# Altium PCB PCB.pcbdoc
Units mm, origin at the board's own origin, x right, y up, seen from the top; angles counter-clockwise.
Board outline 65 x 59.9 mm, 2 copper layers (Top Layer, Bottom Layer); 28 components, 17 nets, 68 pads, 29 vias.
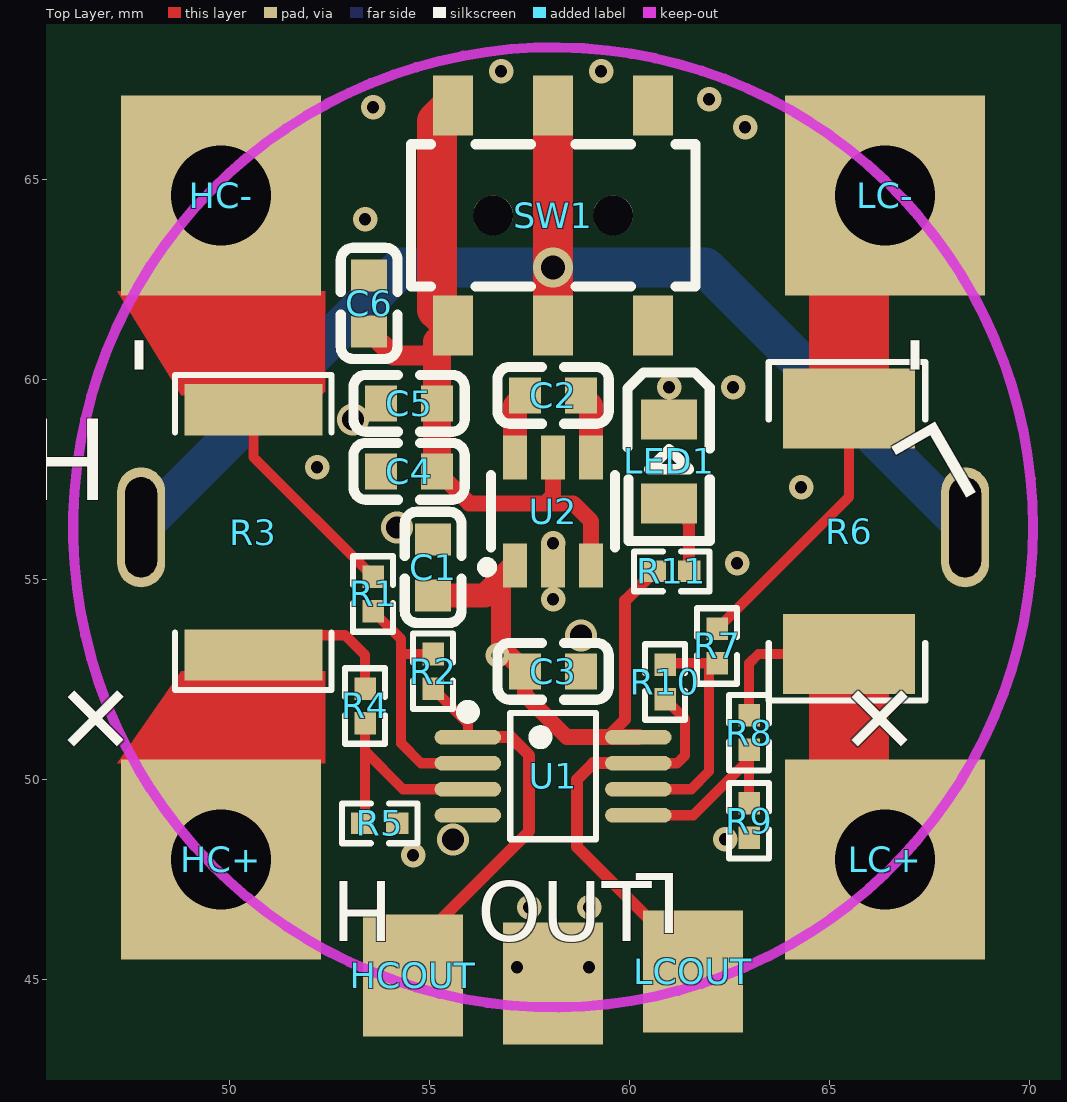
[diagram p0: Top Layer view]
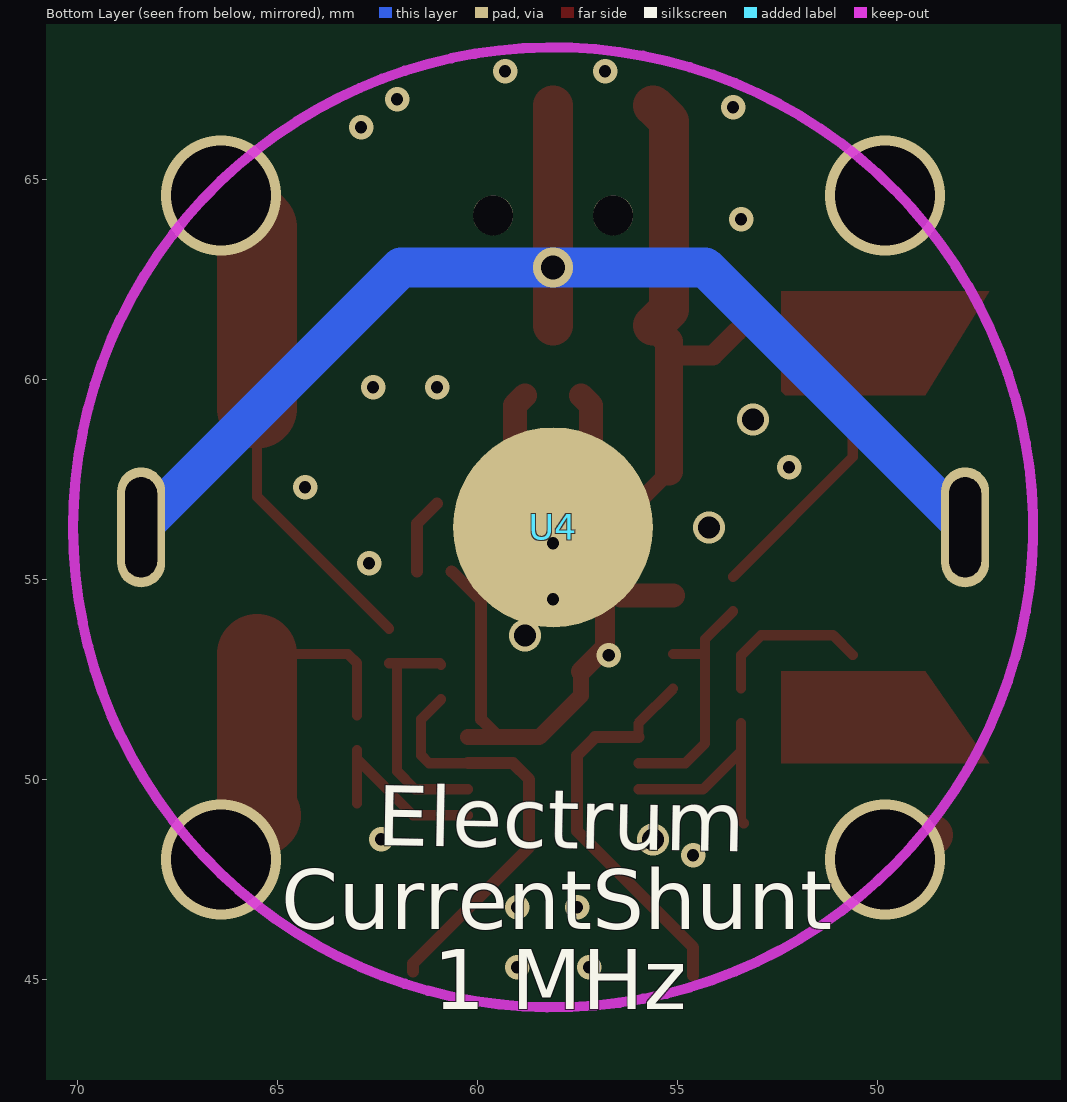
[diagram p1: Bottom Layer view, seen from below]

## Layer stack, top to bottom
Top Layer: signal copper (thickness not stored)
Dielectric: dielectric 0.32, FR-4, Dk 4.8
Bottom Layer: signal copper (thickness not stored)

## Board outline
90.4,25.4 25.4,25.4 25.4,85.3 90.4,85.3

## Components (designator, comment, footprint, x,y, rotation, side; value= is the part's Value field where it differs from the comment)
C1 "22uF" C0603 55.1,55.3 r90 top
C2 "2.2uF" C0603 58.1,59.6 r180 top
C3 "22uF" C0603 58.1,52.7 r0 top
C4 "22uF" C0603 54.5,57.7 r0 top
C5 "22uF" C0603 54.5,59.4 r0 top
C6 "22uF" C0603 53.5,61.9 r270 top
HC+ "Pad" PAD#1 32.09,36.408 r0 top
HC- "Pad" PAD#2 33.59,51.708 r0 top
HCOUT "Pad" PAD#3 38.09,32.908 r0 top
LC+ "Pad" PAD#4 51.09,36.508 r0 top
LC- "Pad" PAD#5 50.09,52.408 r0 top
LCOUT "Pad" PAD#3 45.09,33.008 r0 top
LED1 "0805G (Green)" LED0805-R-RD 61,57.95 r270 top
R1 "1kΩ" R0402 53.6,54.633 r270 top
R2 "20kΩ" R0402 55.1,52.7 r270 top
R3 "50mΩ" R2512 50.607,56.173 r90 top
R4 "1kΩ" R0402 53.4,51.833 r270 top
R5 "20kΩ" R0402 53.767,48.9 r180 top
R6 "500mΩ" RES-SMD_L6.4-W3.2-R2512 65.5,56.2 r90 top
R7 "1kΩ" R0402 62.2,53.333 r90 top
R8 "1kΩ" R0402 63,51.167 r90 top
R9 "20kΩ" R0402 63,48.967 r270 top
R10 "20kΩ" R0402 60.9,52.433 r90 top
R11 "10kΩ" R0402 61.067,55.2 r180 top
SW1 "MS-22C01-G010" SW-SMD_6P-L7.2-W3.5-P2.50-LS6.0-TL 58.1,64.1 r0 top
U1 "OPA2322AIDGKR" VSSOP-8_L3.0-W3.0-P0.65-LS5.0-BL 58.1,50.077 r270 top
U2 "HX4002" SOT-23-6_L2.9-W1.6-P0.95-LS2.8-BR 58.1,56.7 r270 top
U4 "MY-2032-02 COPY" BATT-TH_MY-2032-02 58.1,56.3 r0 bottom

## Footprints (in the part's own frame and the unit in brackets; to place one, negate y for a bottom-side part, rotate by r counter-clockwise, add the part's x,y. Pads: shape width x height; smd on the part's side, far side on the other; paste and mask are expansions set on the pad)
BATT-TH_MY-2032-02 [mm]
  oval 1.2x3 hole 0.8 slot 2.5 at 90 deg paste+0 mask+0.051: 1(-10.3,0) 1(10.3,0)
  round 5 smd paste+0 mask+0.051: 2(0,0)
C0603 [mm]
  rect 0.8x0.9 smd paste+0 mask+0.051: 1(-0.7,0) 2(0.7,0)
  silkscreen extent -1.39,-0.71 1.39,0.71
LED0805-R-RD [mm]
  rect 1x1.4 smd paste+0 mask+0.051: 1(1.05,0) 2(-1.05,0)
  silkscreen extent -2.22,-1.04 1.99,1.01
PAD#1 [mm]
  rect 5x5 smd paste+0 mask+0.051: 1(17.71,11.592)
PAD#2 [mm]
  rect 5x5 smd paste+0 mask+0.051: 1(16.21,12.892)
PAD#3 [mm]
  rect 2.5x3.048 smd paste+0 mask+0.051: 1(16.51,12.192)
PAD#4 [mm]
  rect 5x5 smd paste+0 mask+0.051: 1(15.31,11.492)
PAD#5 [mm]
  rect 5x5 smd paste+0 mask+0.051: 1(16.31,12.192)
R0402 [mm]
  rect 0.566x0.54 smd paste-100 mask+0.051: 1(-0.433,0) 2(0.433,0)
  silkscreen extent -0.94,-0.5 0.94,0.5
R2512 [mm]
  rect 1.283x3.456 smd paste-100 mask+0.051: 1(-3.066,0) 2(3.066,0)
  silkscreen extent -3.94,-1.96 3.94,1.96
RES-SMD_L6.4-W3.2-R2512 [mm]
  rect 2x3.3 smd paste+0 mask+0.051: 1(-3.066,0) 2(3.066,0)
  silkscreen extent -4.23,-1.91 4.23,2.01
SOT-23-6_L2.9-W1.6-P0.95-LS2.8-BR [mm]
  rect 1.1x0.6 smd paste+0 mask+0.051: 1(1.35,-0.95) 2(1.35,0) 3(1.35,0.95) 4(-1.35,0.95) 5(-1.35,0) 6(-1.35,-0.95)
  silkscreen extent -0.9,-1.78 1.52,1.55
SW-SMD_6P-L7.2-W3.5-P2.50-LS6.0-TL [mm]
  rect 1x1.5 smd paste+0 mask+0.05: 1(-2.5,2.75) 2(0,2.75) 3(2.5,2.75) 4(-2.5,-2.75) 5(0,-2.75) 6(2.5,-2.75)
  round 1 hole 1 unplated paste+0: ""(-1.5,0) ""(1.5,0)
  silkscreen extent -3.56,-1.78 3.56,1.78
VSSOP-8_L3.0-W3.0-P0.65-LS5.0-BL [mm]
  oval 0.364x1.662 smd paste+0 mask+0.051: 1(-0.975,-2.131) 2(-0.325,-2.131) 3(0.325,-2.131) 4(0.975,-2.131) 5(0.975,2.131) 6(0.325,2.131) 7(-0.325,2.131) 8(-0.975,2.131)
  silkscreen extent -1.76,-2.28 1.58,1.07

## Free pads (board coordinates)
  rect 2.5x3.048 smd paste+0 mask+0.051: 1(58.1,44.9)

## Via types
v1: diameter 0.61, hole 0.305, Top Layer to Bottom Layer, tented both sides, 20 vias
v2: diameter 0.8, hole 0.55, Top Layer to Bottom Layer, tented both sides, 4 vias
v3: diameter 3, hole 2.5, Top Layer to Bottom Layer, tented both sides, 4 vias
v4: diameter 1, hole 0.6, Top Layer to Bottom Layer, tented both sides, 1 vias

## Nets (pads, with @x,y where several pads share a name; then routed paths per layer and width w, separated by ;. In a path a pad name is that pad's centre, name@x,y a point inside that pad or via, vN(x,y) a via of type N, cw(c..) or ccw(c..) an arc to the next point about the centre after c; other vN are vias at no path point)
5V: C1.1 C3.1 R11.2 U1.8 U2.1 | length 14.2
  Top Layer w0.3: 59.17,51.052 59.452,51.052 59.9,51.5 59.9,54.466 R11.2
  Top Layer w0.4: C3.1 57.4,52.1 58.448,51.052 U1.8
  Top Layer w0.5: U2.1 56.799,54.999 56.799,53.3 C3.1
  Top Layer w0.6: C1.1 56.4,54.6 U2.1
  other v1: 56.71,53.1
B+: C4.2 C5.2 C6.2 SW1.1 SW1.4 U2.3 U2.5 | length 18.3
  Top Layer w0.4: C4.2 56,56.9 57.9,56.9 ; U2.5 58.1,57.1 57.9,56.9 ; U2.3 59.05,56.45 58.6,56.9 57.9,56.9
  Top Layer w0.5: C6.2@53.5,61.2 54.101,60.599 55.2,60.599
  Top Layer w0.7: C4.2 C5.2 55.2,60.95 SW1.4
  Top Layer w1: SW1.4@55.601,61.349 55.199,61.751 55.199,66.45 SW1.1
GND: C1.2 C3.2 C4.1 C5.1 C6.1 LED1.2 pad.1 R5.1 R9.2 U1.4 U2.2 U4.2
  other v1: 57.2,45.3 59,45.3 57.5,46.8 59,46.8 54.6,48.1 62.4,48.5 58.1,54.5 62.7,55.4 58.1,55.9 64.3,57.3 52.2,57.8 61,59.8 62.6,59.8 53.4,64 62.9,66.3 53.6,66.8 62,67 56.8,67.7 59.3,67.7
  other v2: 55.6,48.5 58.8,53.6 54.2,56.3 53.1,59
LED1_1: LED1.1 R11.1 | length 1.9
  Top Layer w0.3: LED1.1 61.5,56.4 R11.1
R1_1: HC-.1 R1.1 R3.2 | length 5.4
  Top Layer w0.254: R3.2 50.607,58.059 R1.1
  other v3: 49.8,64.6
R3_1: HC+.1 R3.1 R4.1 | length 6
  Top Layer w0.254: R3.1 51.1,53.6 52.9,53.6 53.4,53.1 R4.1
  Top Layer w1: HC+.1@48.6,48.601 HC+.1@50.607,48.601
  other v3: 49.8,48
R6_1: LC+.1 R6.1 R8.2 | length 8
  Top Layer w0.254: R8.2 63,52.9 63.234,53.134 R6.1
  Top Layer w2: LC+.1@65.4,49.1 65.5,49.2 R6.1
  other v3: 66.4,48
R6_2: LC-.1 R6.2 R7.2 | length 12.6
  Top Layer w0.254: R7.2 65.5,57.066 R6.2
  Top Layer w2: R6.2 65.5,63.8 66.1,64.4 66.3,64.6 v3(66.4,64.6)
SW1_5: SW1.2 SW1.5 U4.1 | length 31.5
  Top Layer w1: SW1.5 v4(58.1,62.8) SW1.2
  Bottom Layer w1: U4.1@47.8,56.3 54.3,62.8 v4(58.1,62.8) 61.9,62.8 U4.1@68.4,56.3
U1_1: HCOUT.1 R2.2 U1.1 | length 10
  Top Layer w0.254: R2.2 55.969,51.398 U1.1
  Top Layer w0.3: HCOUT.1 54.6,45.8 57.501,48.703 57.501,50.6 57.048,51.052 U1.1
U1_2: R1.2 R2.1 U1.2 | length 6.3
  Top Layer w0.254: R1.2@53.599,54.199 54.3,53.501 54.3,50.9 54.798,50.402 U1.2 ; 54.3,53.064 54.369,53.133 R2.1
U1_3: R4.2 R5.2 U1.3 | length 6.2
  Top Layer w0.254: R5.2 53.4,48.966 R4.2 53.4,50.7 54.348,49.752 U1.3
U1_5: R8.1 R9.1 U1.5 | length 4.9
  Top Layer w0.254: U1.5 61.602,49.102 63,50.5 R8.1 R9.1
U1_6: R7.1 R10.2 U1.6 | length 6.2
  Top Layer w0.254: U1.6 61.552,49.752 61.999,50.199 61.999,52.899 R7.1@62.2,52.899 ; R10.2 60.934,52.9 R7.1
U1_7: LCOUT.1 R10.1 U1.7 | length 10.6
  Top Layer w0.254: U1.7 61.202,50.402 61.4,50.6 61.4,51.5 R10.1
  Top Layer w0.3: U1.7 59.103,50.402 58.699,50.001 58.699,48.302 61.6,45.401 LCOUT.1
U2_4: C2.1 U2.4 | length 1.7
  Top Layer w0.6: C2.1 59.05,59.35 U2.4
U2_6: C2.2 U2.6 | length 1.7
  Top Layer w0.6: U2.6 57.15,59.35 C2.2
pads on no net: SW1. SW1.3 SW1.6

## Polygon pours and split planes (outlines as drawn)
GND on Bottom Layer (solid): 39.8,71 40.6,70.2 77.7,70.2 76.3,68.8 76.3,38.1 75.3,39.1 38.5,39.1
GND on Top Layer (solid): 39.4,72.6 40.2,71.8 77.3,71.8 75.9,70.4 75.9,39.7 74.9,40.7 38.1,40.7

## Keep-outs
Keep-Out Layer:
  circle w0.254: c58.1,56.3 r12

## Other copper
Top Layer:
  region net R3_1: 52.4,52.7 52.4,50.4 47.2,50.4 48.8,52.7
  region net R1_1: 52.4,62.2 52.4,59.7 52.3,59.6 48.8,59.6 47.2,62.2

## Silkscreen, mask and mechanical layers (free items; w line width, h text height)
Top Overlay:
  text "-" at 48.516,60.1 h2.03 r90
  text "-" at 67.916,60.1 h2.03 r90
  text "L" at 67.892,59.08 h2.03 r210
  text "H" at 47,59.016 h2.03 r180
  text "+" at 48.118,51.318 h2.03 r135
  text "+" at 67.718,51.318 h2.03 r135
  text "L" at 61.3,47.65 h1.5 r180
  text "H" at 54.1,47.45 h1.5 r180
  text "OUT" at 56.2,45.95 h1.5
Bottom Overlay:
  text "Electrum" at 62.513,48.35 h1.5 r1
  text "CurrentShunt" at 64.9,46.25 h1.5
  text "1 MHz" at 61.1,44.25 h1.5